# Altium PCB DS157-1.1-C心率传感器.PcbDoc
Units mm, origin at the board's own origin, x right, y up, seen from the top; angles counter-clockwise.
Board outline 10 x 14 mm, 2 copper layers (Top Layer, Bottom Layer); 6 components, 6 nets, 32 pads, 6 vias.
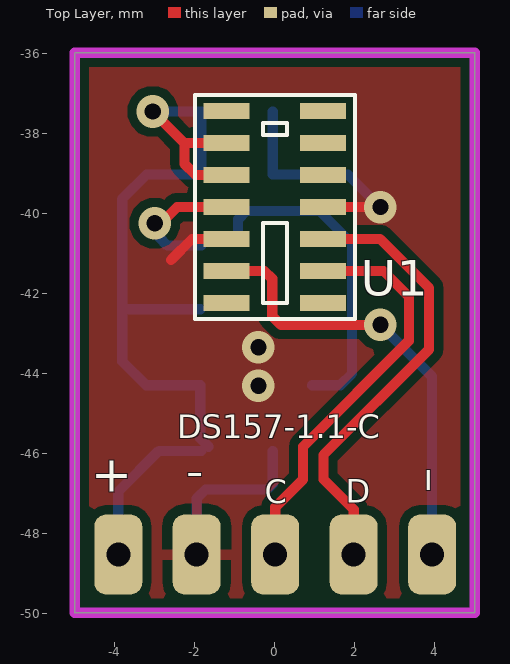
[diagram p0: Top Layer view]
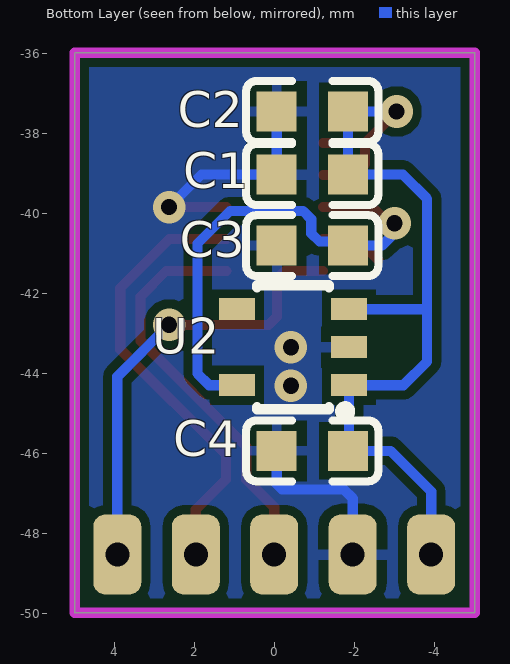
[diagram p1: Bottom Layer view, seen from below]
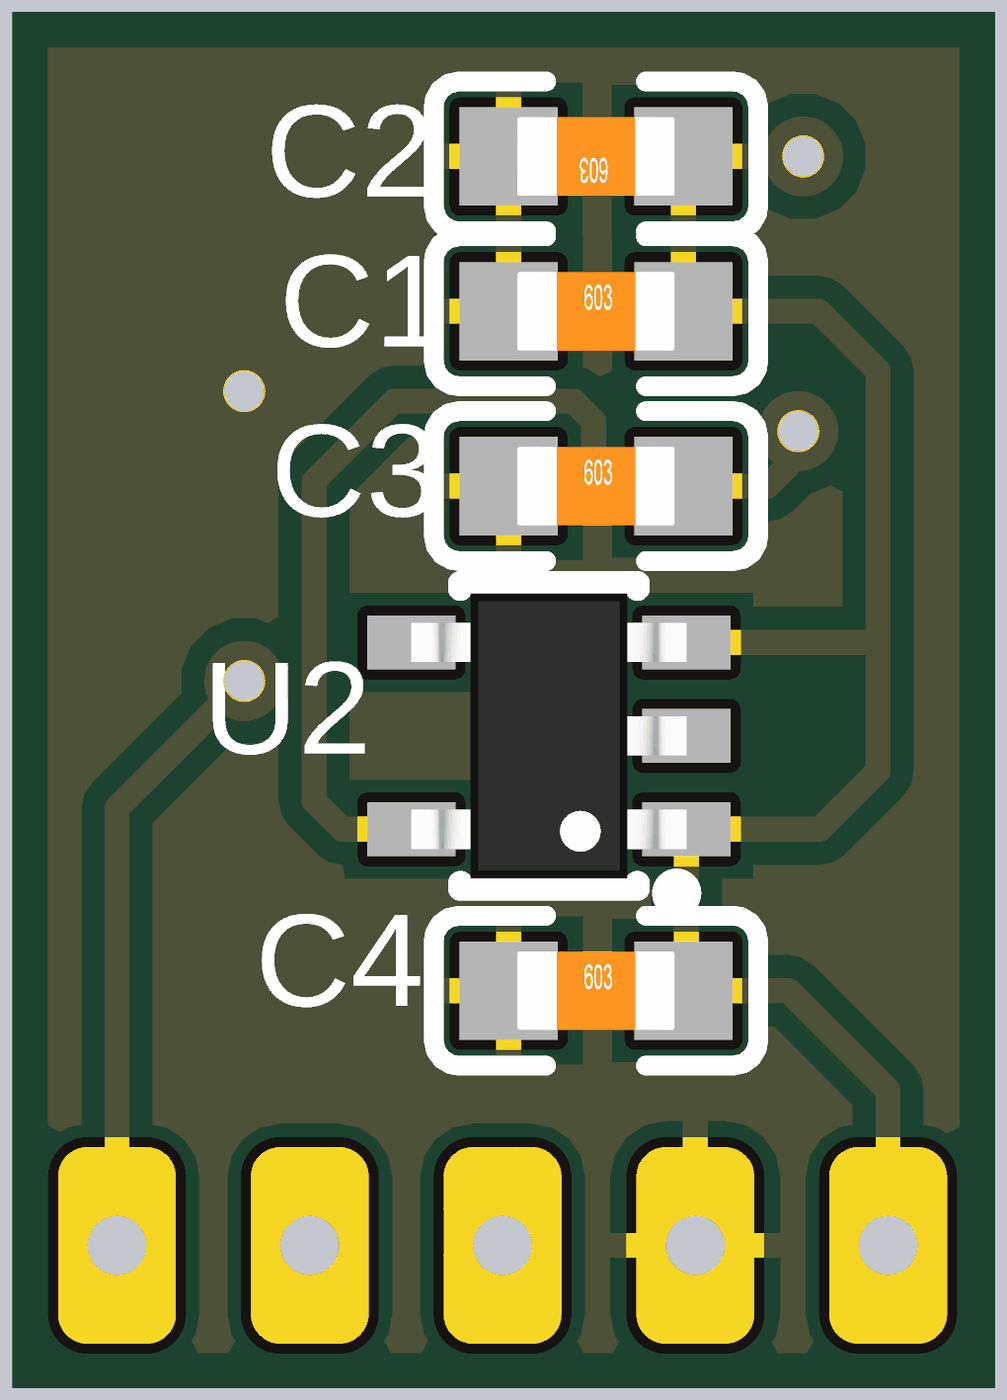
[diagram p2: 3D render of the assembled board from below, using the file's embedded part models]

## Layer stack, top to bottom
Top Solder: solder mask 0.0102, Solder Resist, Dk 3.5
Top Layer: signal copper 0.0356
Dielectric 1: dielectric 0.32, FR-4, Dk 4.8
Bottom Layer: signal copper 0.0356
Bottom Solder: solder mask 0.0102, Solder Resist, Dk 3.5

## Board outline
-5,-49.97 5,-49.97 5,-35.97 -5,-35.97

## Design rules (kind name [scope] priority, off if disabled: settings)
Clearance [All] p1: gap=0.152 ignorepadtopadclearanceinfootprint=TRUE except(0.229: Arc-Fill Arc-Poly Arc-Region Track-Fill Track-Poly Track-Region SMDPad-Fill SMDPad-Poly SMDPad-Region THPad-Fill THPad-Poly THPad-Region Via-Fill Via-Poly Via-Region Fill-Fill Fill-Poly Fill-Region Poly-Poly Poly-Region Region-Region)
PolygonConnect [All] p1: thpad.connectstyle=Relief thpad.reliefconductorwidth=0.254 thpad.reliefentries=4 thpad.polygonreliefangle="90 Angle" thpad.airgapwidth=0.254 smdpad.connectstyle=Relief smdpad.reliefconductorwidth=0.254 smdpad.reliefentries=4 smdpad.polygonreliefangle="90 Angle" smdpad.airgapwidth=0.254 via.connectstyle=Direct via.reliefconductorwidth=0.254 via.reliefentries=4 via.polygonreliefangle="90 Angle" via.airgapwidth=0.254
RoutingVias [All] p1: holewidth=0.406 width=0.813 viastyle="Through Hole" minholewidth=0.406 minwidth=0.813 maxholewidth=0.711 maxwidth=1.27
SolderMaskExpansion [All] p1: expansion=0.102 istentingtop=FALSE
Width [All] p1: maxlimit=0.508 minlimit=0.152 preferedwidth=0.254
30 further rules are at their usual default settings.

## Components (designator, comment, footprint, x,y, rotation, side; value= is the part's Value field where it differs from the comment)
C1 "SMDCAP00016" 0603CAP -0.939,-39.014 r180 bottom value=10uF
C2 "SMDCAP00013" 0603CAP -0.939,-37.44 r0 bottom value=100nF
C3 "SMDCAP00013" 0603CAP -0.939,-40.792 r180 bottom value=100nF
C4 "SMDCAP00015" 0603CAP -0.939,-45.923 r180 bottom value=1uF
U1 "MAX30102" OESIP-14 0,-39.827 r180 top locked
U2 "ME6211C33M5G-N" SOT23-5 -0.46,-43.332 r90 bottom

## Footprints (in the part's own frame and the unit in brackets; to place one, negate y for a bottom-side part, rotate by r counter-clockwise, add the part's x,y. Pads: shape width x height; smd on the part's side, far side on the other; paste and mask are expansions set on the pad)
0603CAP [mm]
  rect 1x1 smd: 1(-0.889,0) 2(0.89,0)
  silkscreen extent -1.65,-0.76 1.65,0.76, body extent -0.8,-0.4 0.8,0.4, height 0.3
OESIP-14 [mil]
  rect 45x16 smd: 1(-47.5,94.49) 2(-47.5,62.99) 3(-47.5,31.5) 4(-47.5,0) 5(-47.5,-31.5) 6(-47.5,-62.99) 7(-47.5,-94.49) 8(47.5,-94.49) 9(47.5,-62.99) 10(47.5,-31.5) 11(47.5,0) 12(47.5,31.5) 13(47.5,62.99) 14(47.5,94.49)
  silkscreen extent -79,-110 78,110
SOT23-5 [mm] "SOT-23/SC-74A; 5 Leads; Body 3.1 x 3 mm, inc. leads (LxW max)"
  rect 0.55x0.9 smd: 1(-0.95,-1.4) 2(0,-1.4) 3(0.95,-1.4) 4(0.95,1.4) 5(-0.95,1.4)
  silkscreen extent -1.7,-1.4 1.55,0.9, body extent -1.45,-1.4 1.45,1.4, height 1.45

## Part data
C1: library part "MLCC 10uF 50V ±10％ 0603", "贴片电容"
C2 C3: library part "MLCC 100nF 50V ±10％ 0603", "贴片电容"
C4: library part "MLCC 1uF 50V ±10％ 0603", "贴片电容"
U2: "稳压芯片"

## Free pads (board coordinates)
  rrect50% 1.2x2 hole 0.6: 1(-3.912,-48.514) 2(-1.95,-48.514) 2(0.012,-48.514) 2(1.974,-48.514) 2(3.936,-48.514)

## Via types
v1: diameter 0.813, hole 0.406, Top Layer to Bottom Layer, tented both sides, 6 vias

## Nets (pads, with @x,y where several pads share a name; then routed paths per layer and width w, separated by ;. In a path a pad name is that pad's centre, name@x,y a point inside that pad or via, vN(x,y) a via of type N, cw(c..) or ccw(c..) an arc to the next point about the centre after c; other vN are vias at no path point)
GND: C1.1 C2.2 C3.1 C4.1 pad.2@-1.95,-48.514 U1.4 U1.12 U2.2 | length 11.9
  Top Layer w0.254: -2.591,-41.148 -2.07,-40.627 U1.12 ; U1.4 v1(2.642,-39.827)
  Bottom Layer w0.254: pad.2@-1.95,-48.514 -1.95,-47.111 -1.727,-46.888 -0.189,-46.888 -0.05,-46.749 C4.1 ; C2.2 -0.049,-39.013 C1.1 1.829,-39.014 v1(2.642,-39.827)
  other v1: -0.406,-44.298 -0.406,-43.332
I2C1_SCL: pad.2@0.012,-48.514 U1.2 | length 10.2
  Top Layer w0.254: pad.2@0.012,-48.514 0.012,-47.333 0.711,-46.634 0.711,-45.814 3.353,-43.173 3.353,-42.062 2.718,-41.427 U1.2
I2C1_SDA: pad.2@1.974,-48.514 U1.3 | length 11.2
  Top Layer w0.254: U1.3 2.636,-40.627 3.861,-41.852 3.861,-43.383 1.219,-46.025 1.219,-46.634 1.974,-47.389 pad.2@1.974,-48.514
INT2: pad.2@3.936,-48.514 U1.13 | length 11.2
  Top Layer w0.254: U1.13 -0.254,-41.427 -0.061,-41.621 -0.061,-42.56 0.153,-42.774 v1(2.642,-42.774)
  Bottom Layer w0.254: v1(2.642,-42.774) 3.936,-44.068 pad.2@3.936,-48.514
VCC_1V8: C3.2 U1.11 U2.5 | length 12.5
  Top Layer w0.254: v1(-2.997,-40.234) -2.846,-40.234 -2.44,-39.827 U1.11
  Bottom Layer w0.254: v1(-2.997,-40.234) -2.89,-40.341 -2.89,-40.585 -2.683,-40.792 C3.2 ; C3.2@-1.829,-40.691 -1.118,-40.691 -0.914,-40.488 -0.914,-40.132 -0.711,-39.929 1.118,-39.929 1.93,-40.742 1.93,-43.993 1.641,-44.282 U2.5
VCC_3V3_MCU: C1.2 C2.1 C4.2 pad.1 U1.9 U1.10 U2.1 U2.3 | length 22.8
  Top Layer w0.254: v1(-3.047,-37.44) -2.259,-38.227 ; U1.10 -1.981,-39.027 -2.259,-38.749 -2.259,-38.227 ; U1.9 -2.259,-38.227
  Bottom Layer w0.254: pad.1 -3.912,-46.939 -2.896,-45.923 C4.2 ; v1(-3.047,-37.44) C2.1 C2.1 C1.2 -3.2,-39.014 -3.81,-39.624 -3.81,-42.418 ; U2.3 -3.774,-42.382 -3.81,-42.418 ; C4.2@-1.652,-45.822 -1.86,-45.614 U2.1 -3.216,-44.282 -3.81,-43.688 -3.81,-42.418
pads on no net: U1.1 U1.5 U1.6 U1.7 U1.8 U1.14 U2.4

## Polygon pours and split planes (outlines as drawn)
GND on Bottom Layer "GND_L02_P000" (solid, remove dead copper, pour order 0): 5,-49.886 -5,-49.886 -5,-35.97 5,-35.97
GND on Top Layer "GND_L01_P001" (solid, remove dead copper, pour order 1): 5,-49.841 -5,-49.841 -5,-35.925 5,-35.925

## Keep-outs
Keep-Out Layer:
  the board outline again, w0.254

## Other copper
Top Layer:
  pour cut-out: -2.007,-42.659 -1.975,-42.627 2.007,-42.627 2.007,-37.027 -1.993,-37.027

## Silkscreen, mask and mechanical layers (free items; w line width, h text height)
Top Overlay:
  text "DS157-1.1-C" at -2.438,-45.811 h1
  text "C" at -0.254,-46.442 h1 r180
  text "D" at 1.778,-46.431 h1 r180
  text "I" at 3.962,-47.092 h1
  text "-" at -1.778,-47.131 h1.52
  text "+" at -3.556,-47.249 h1.52
Mechanical 1:
  lines w0.254: -5,-49.97 5,-49.97 ; -5,-49.97 -5,-35.97 ; -5,-49.97 5,-49.97 ; -5,-49.97 -5,-35.97 ; -5,-35.97 5,-35.97 ; -5,-35.97 5,-35.97 ; 5,-49.97 5,-35.97 ; 5,-49.97 5,-35.97